# Altium PCB SectionD_v1.0.PcbDoc
Units mil, origin at the board's own origin, x right, y up, seen from the top; angles counter-clockwise.
Board outline 6000 x 4000 mil, 2 copper layers (Top Layer, Bottom Layer), stack 61.756 mil thick; 80 components, 93 nets, 361 pads, 0 vias.
Unrouted connection lines stored in the file: 236.
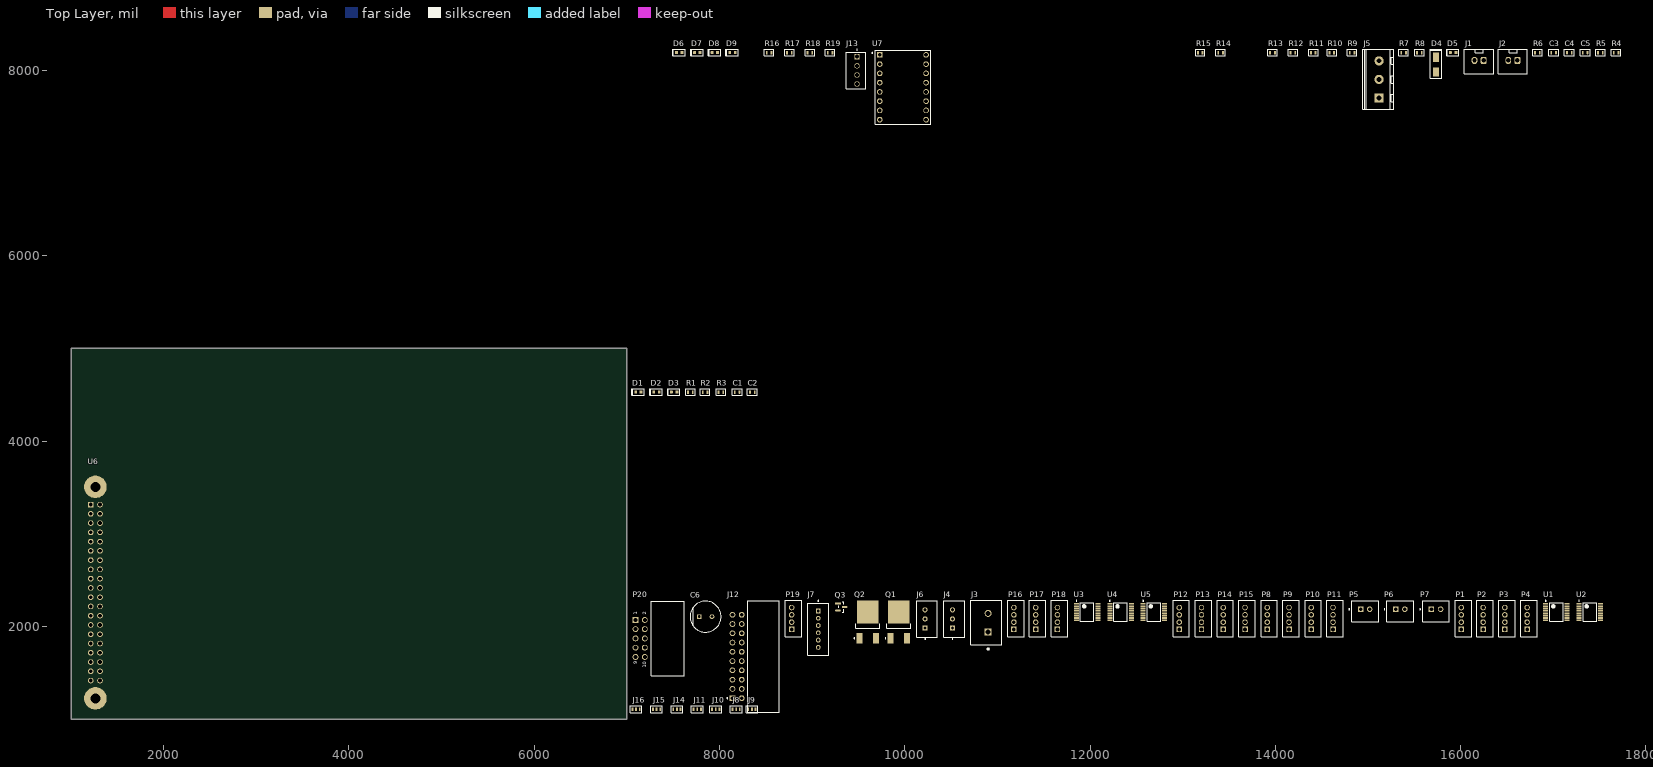
[diagram p0: Top Layer view]
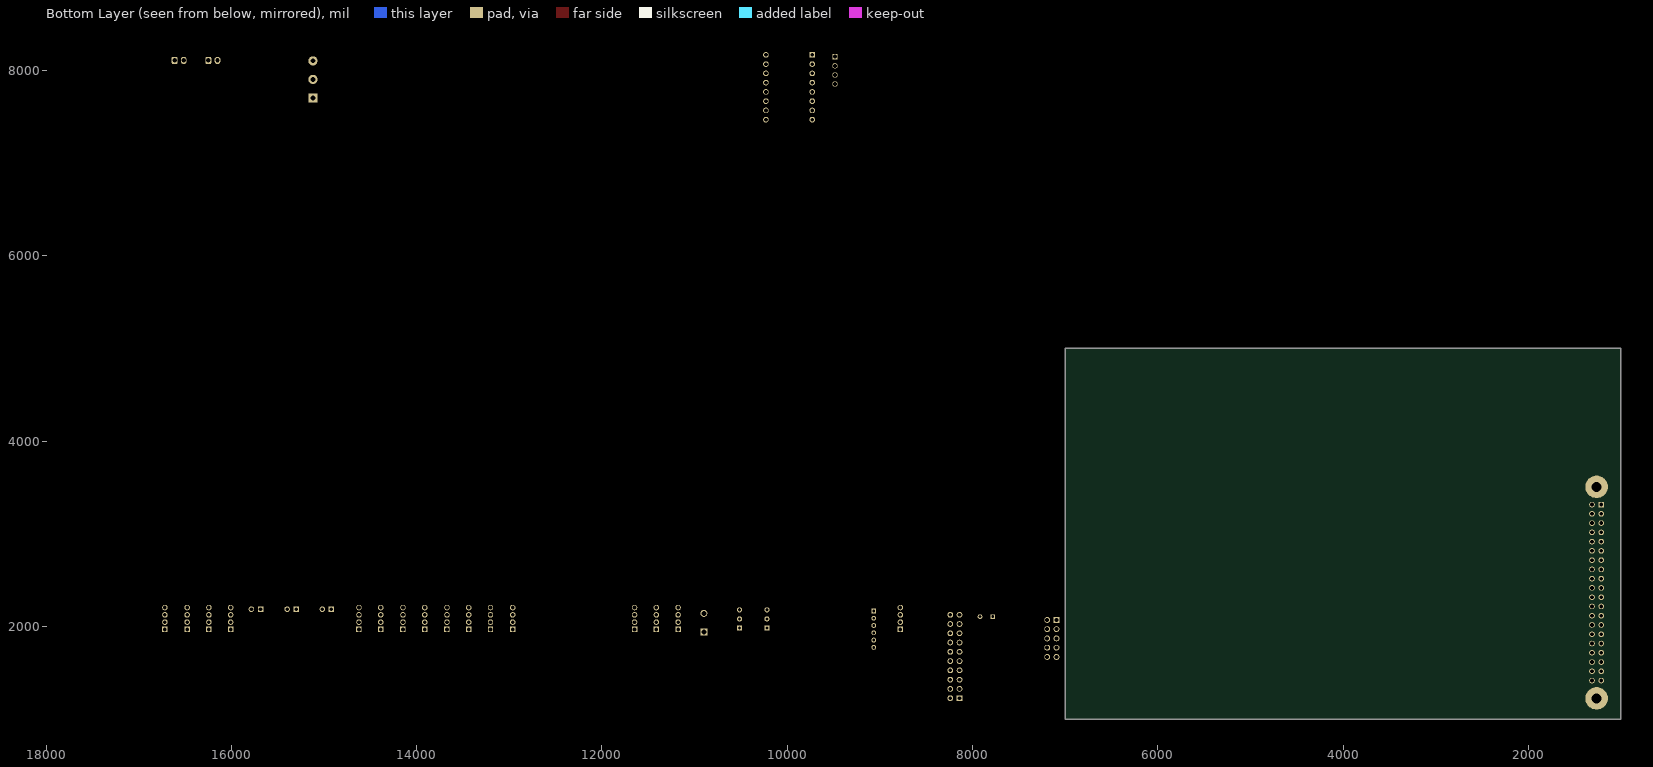
[diagram p1: Bottom Layer view, seen from below]

## Layer stack, top to bottom
Top Solder: solder mask 1, SM-001, Dk 4
Top Layer: signal copper 1.378
Dielectric 1: core 59, Core-043, Dk 4.3
Bottom Layer: signal copper 1.378
Bottom Solder: solder mask 1, SM-001, Dk 4

## Board outline
1000,1000 7000,1000 7000,5000 1000,5000

## Design rules (kind name [scope] priority, off if disabled: settings)
Clearance [All] p1: gap=10 ignorepadtopadclearanceinfootprint=FALSE except(0: Arc-Hole Track-Hole SMDPad-Hole THPad-Hole Via-Hole Fill-Hole Poly-Hole Region-Hole Text-Hole)
PolygonConnect [All] p1: connectstyle=Relief reliefconductorwidth=10 reliefentries=4 polygonreliefangle="90 Angle" airgapwidth=10
RoutingVias [All] p1: holewidth=28 width=50 viastyle="Through Hole" minholewidth=28 minwidth=50 maxholewidth=28 maxwidth=50
SolderMaskExpansion [All] p1: expansion=4 istentingtop=FALSE
Width [All] p1: maxlimit=10 minlimit=10 preferedwidth=10
30 further rules are at their usual default settings.

## Components (designator, comment, footprint, x,y, rotation, side; value= is the part's Value field where it differs from the comment)
C1 "0.1uF" "0.1uF 0603" 8190,4530 r0 top
C2 "0.1uF" "0.1uF 0603" 8355,4530 r0 top
C3 "0.1uF" "0.1uF 0603" 17005,8195 r0 top
C4 "0.1uF" "0.1uF 0603" 17175,8195 r0 top
C5 "0.1uF" "0.1uF 0603" 17345,8195 r0 top
C6 "EEU-FC1V221L" FP-EEU-FC1V221L-MFG 7850,2105 r0 top value=220uF
D1 "LED - Orange" LED0603-Orange 7125,4530 r0 top
D2 "LED - Orange" LED0603-Orange 7320,4530 r0 top
D3 "LED - Orange" LED0603-Orange 7510,4530 r0 top
D4 "1N4007" "M7 1N4007 SMA" 15735,8065 r90 top
D5 "LED - Orange" LED0603-Orange 15920,8195 r0 top
D6 "LED - Orange" LED0603-Orange 7565,8195 r0 top
D7 "LED - Orange" LED0603-Orange 7760,8195 r0 top
D8 "LED - Orange" LED0603-Orange 7950,8195 r0 top
D9 "LED - Orange" LED0603-Orange 8140,8195 r0 top
J1 "JST-XH 2P" "JST-XH 2P" 16200,8110 r0 top
J2 "JST-XH 2P" "JST-XH 2P" 16565,8110 r0 top
J3 "1755736" PHOE-1755736-2_V 10900,2040 r90 top
J4 "B3B-XH-A(LF)(SN)" FP-B3B-XH-A_LF_SN-MFG 10535,2080 r90 top
J5 "Screw Terminal" "Screw Terminal 3P 5.08MM" 15120,7905 r90 top
J6 "B3B-XH-A(LF)(SN)" FP-B3B-XH-A_LF_SN-MFG 10240,2080 r90 top
J7 "1735446-6" FP-1735446-6-MFG 9065,1970 r90 top
J8 "Solder Jumper" "SOLDER JUMPER" 8180,1105 r0 top
J9 "Solder Jumper" "SOLDER JUMPER" 8350,1105 r0 top
J10 "Solder Jumper" "SOLDER JUMPER" 7960,1105 r0 top
J11 "Solder Jumper" "SOLDER JUMPER" 7760,1105 r0 top
J12 "SFH11-PBPC-D10-RA-BK" FP-SFH11-PBPC-D10-RA-BK-MFG 8470,1675 r90 top
J13 "172732-4" TE_172732-4 9485,8150 r90 top
J14 "Solder Jumper" "SOLDER JUMPER" 7540,1105 r0 top
J15 "Solder Jumper" "SOLDER JUMPER" 7320,1105 r0 top
J16 "Solder Jumper" "SOLDER JUMPER" 7100,1105 r0 top
P1 "B4B-PH-K-S(LF)(SN)" JST-B4B-PH-K-S_V 16030,2085 r90 top
P2 "B4B-PH-K-S(LF)(SN)" JST-B4B-PH-K-S_V 16265,2085 r90 top
P3 "B4B-PH-K-S(LF)(SN)" JST-B4B-PH-K-S_V 16500,2085 r90 top
P4 "B4B-PH-K-S(LF)(SN)" JST-B4B-PH-K-S_V 16740,2085 r90 top
P5 "B2B-XH-A(LF)(SN)" JST-B2B-XH-A_V 14970,2185 r0 top
P6 "B2B-XH-A(LF)(SN)" JST-B2B-XH-A_V 15350,2185 r0 top
P7 "B2B-XH-A(LF)(SN)" JST-B2B-XH-A_V 15735,2185 r0 top
P8 "B4B-PH-K-S(LF)(SN)" JST-B4B-PH-K-S_V 13935,2085 r90 top
P9 "B4B-PH-K-S(LF)(SN)" JST-B4B-PH-K-S_V 14170,2085 r90 top
P10 "B4B-PH-K-S(LF)(SN)" JST-B4B-PH-K-S_V 14410,2085 r90 top
P11 "B4B-PH-K-S(LF)(SN)" JST-B4B-PH-K-S_V 14645,2085 r90 top
P12 "B4B-PH-K-S(LF)(SN)" JST-B4B-PH-K-S_V 12985,2085 r90 top
P13 "B4B-PH-K-S(LF)(SN)" JST-B4B-PH-K-S_V 13225,2085 r90 top
P14 "B4B-PH-K-S(LF)(SN)" JST-B4B-PH-K-S_V 13460,2085 r90 top
P15 "B4B-PH-K-S(LF)(SN)" JST-B4B-PH-K-S_V 13695,2085 r90 top
P16 "B4B-PH-K-S(LF)(SN)" JST-B4B-PH-K-S_V 11200,2085 r90 top
P17 "B4B-PH-K-S(LF)(SN)" JST-B4B-PH-K-S_V 11435,2085 r90 top
P18 "B4B-PH-K-S(LF)(SN)" JST-B4B-PH-K-S_V 11670,2085 r90 top
P19 "B4B-PH-K-S(LF)(SN)" JST-B4B-PH-K-S_V 8800,2085 r90 top
P20 "61201021721" 61201021721 7440,1870 r90 top
Q1 "NTD4805NT4G" ONSC-DPAK-3-369AA-01_V 9935,2045 r90 top
Q2 "NTD4805NT4G" ONSC-DPAK-3-369AA-01_V 9600,2045 r90 top
Q3 "BSS138" FP-318-08-IPC_B 9315,2210 r0 top
R1 "68R" "68R 0603" 7685,4530 r0 top
R2 "68R" "68R 0603" 7845,4530 r0 top
R3 "68R" "68R 0603" 8015,4530 r0 top
R4 "1k" "R0603 1k" 17680,8195 r0 top
R5 "1k" "R0603 1k" 17510,8195 r0 top
R6 "68R" "68R 0603" 16830,8195 r0 top
R7 "10k" "10k R0603" 15385,8195 r0 top
R8 "10k" "10k R0603" 15555,8195 r0 top
R9 "1k" "R0603 1k" 14830,8195 r0 top
R10 "1k" "R0603 1k" 14610,8195 r0 top
R11 "1k" "R0603 1k" 14410,8195 r0 top
R12 "4k7" "R0603 1k" 14190,8195 r0 top
R13 "1k" "R0603 1k" 13970,8195 r0 top
R14 "1k" "R0603 1k" 13410,8195 r0 top
R15 "1k" "R0603 1k" 13190,8195 r0 top
R16 "68R" "68R 0603" 8535,8195 r0 top
R17 "68R" "68R 0603" 8755,8195 r0 top
R18 "68R" "68R 0603" 8975,8195 r0 top
R19 "68R" "68R 0603" 9195,8195 r0 top
U1 "SN74HC595PWR" PW0016A_N 17035,2155 r0 top
U2 "SN74HC595PWR" PW0016A_N 17395,2155 r0 top
U3 "SN74HC165PWR" PW0016A_N 11970,2155 r0 top
U4 "SN74HC165PWR" PW0016A_N 12330,2155 r0 top
U5 "SN74HC165PWR" PW0016A_N 12690,2155 r0 top
U6 "RASPBERRY_PI_3_MODEL_B+" MODULE_RASPBERRY_PI_3_MODEL_B+ 1212,3315 r270 top
U7 "STEPPER_MOTOR_DRIVER_CARRIER" MODULE_A4988_STEPPER_MOTOR_DRIVER_CARRIER 9980,7820 r0 top

## Footprints (in the part's own frame and the unit in brackets; to place one, negate y for a bottom-side part, rotate by r counter-clockwise, add the part's x,y. Pads: shape width x height; smd on the part's side, far side on the other; paste and mask are expansions set on the pad)
"0.1uF 0603" [mm]
  rrect50% 0.5x0.95 smd: 1(-0.65,0) 2(0.65,0)
  silkscreen extent -1.4,-0.9 1.4,0.9, body extent -0.8,-0.4 0.8,0.4, height 0.8
"10k R0603" [mm]
  rect 0.5x0.95 smd: 1(-0.65,0) 2(0.65,0)
  silkscreen extent -1.3,-0.9 1.3,0.9, body extent -0.8,-0.4 0.8,0.4, height 0.45
"68R 0603" [mm]
  rect 0.5x0.95 smd: 1(-0.65,0) 2(0.65,0)
  silkscreen extent -1.3,-0.9 1.3,0.9, body extent -0.8,-0.4 0.8,0.4, height 0.45
61201021721 [mm] "10 pins, right angled, gold plating"
  rect 1.6x1.6 hole 1.1: 1(5.08,8.805)
  round 1.6 hole 1.1: 2(5.08,6.265) 3(2.54,8.805) 4(2.54,6.265) 5(0,8.805) 6(0,6.265) 7(-2.54,8.805) 8(-2.54,6.265) 9(-5.08,8.805) 10(-5.08,6.265)
  silkscreen extent -10.26,-4.5 10.26,4.5, body extent -10.18,-4.42 10.18,9.13, height 9.23
FP-318-08-IPC_B [mm]
  rect 1.524x0.578 smd paste+0 mask+0: 1(-0.91,0.95)
  rrect100% 1.524x0.578 smd paste+0 mask+0: 2(-0.91,-0.95) 3(0.91,0)
  silkscreen extent -0.65,-1.45 0.65,1.45, body extent -1.92,-1.7 1.92,1.7, height 0.25
FP-1735446-6-MFG [mm]
  rect 1.3x1.3 hole 0.8 paste-1000 mask+0: 1(5,-0.03)
  round 1.3 hole 0.8 paste-1000 mask+0: 2(3,-0.03) 3(1,-0.03) 4(-1,-0.03) 5(-3,-0.03) 6(-5,-0.03)
  silkscreen extent -7.15,-2.9 7.87,2.9, body extent -7.25,-3 7.25,3, height 0.25
FP-B3B-XH-A_LF_SN-MFG [mm]
  rect 1.4x1.4 hole 0.9 paste-1000 mask+0: 1(-2.5,0.525)
  round 1.4 hole 0.9 paste-1000 mask+0: 2(0,0.525) 3(2.5,0.525)
  silkscreen extent -5.61,-2.88 4.95,2.88, body extent -5.05,-2.98 5.05,2.98, height 0.25
FP-EEU-FC1V221L-MFG [mm]
  rect 1.3x1.3 hole 0.8 paste-1000 mask+0: 1(-1.75,0)
  round 1.3 hole 0.8 paste-1000 mask+0: 2(1.75,0)
  silkscreen extent -4.25,-4.25 4.25,4.25, body extent -4.35,-4.35 4.35,4.35, height 0.25
FP-SFH11-PBPC-D10-RA-BK-MFG [mm]
  rect 1.57x1.57 hole 1.02 paste-1000 mask+0: 1(-11.43,8.39)
  round 1.57 hole 1.02 paste-1000 mask+0: 2(-11.43,5.85) 3(-8.89,8.39) 4(-8.89,5.85) 5(-6.35,8.39) 6(-6.35,5.85) 7(-3.81,8.39) 8(-3.81,5.85) 9(-1.27,8.39) 10(-1.27,5.85) 11(1.27,8.39) 12(1.27,5.85) 13(3.81,8.39) 14(3.81,5.85) 15(6.35,8.39) 16(6.35,5.85) 17(8.89,8.39) 18(8.89,5.85) 19(11.43,8.39) 20(11.43,5.85)
  silkscreen extent -15.24,-4.45 15.24,9.92, body extent -15.34,-4.55 15.34,9.28, height 0.25
JST-B2B-XH-A_V [mm] "Header, 2-Leads, Body 7.4x5.75mm, Pitch 2.5mm"
  rect 1.5x1.5 hole 1: 1(-1.25,0)
  round 1.5 hole 1: 2(1.25,0)
  silkscreen extent -4.47,-3.4 3.7,2.35, body extent -3.7,-3.4 3.7,2.35, height 7
JST-B4B-PH-K-S_V [mm] "Connector, 4-Leads, Body 9.9x4.5mm, Pitch 2mm"
  rect 1.5x1.5 hole 1: 1(-3,0.55)
  round 1.5 hole 1: 2(-1,0.55) 3(1,0.55) 4(3,0.55)
  silkscreen extent -4.95,-2.25 4.95,2.25, body extent -4.95,-2.25 4.95,2.25, height 6
"JST-XH 2P" [mm]
  rrect50% 1.6x2 hole 1.2: 1(1.25,0)
  oval 1.6x2 hole 1.2: 2(-1.25,0)
  silkscreen extent -4,-3.6 4,3.1, body extent -3.7,-3.3 3.7,2.8, height 7.01
LED0603-Orange [mm]
  rrect50% 0.8x0.8 smd: 1(-0.75,0)
  rect 0.8x0.8 smd: 2(0.75,0)
  silkscreen extent -1.8,-0.9 1.6,1, body extent -0.8,-0.4 0.8,0.4, height 0.7
"M7 1N4007 SMA" [mm]
  rect 2.5x1.7 smd: 1(-2,0) 2(2,0)
  silkscreen extent -3.8,-1.6 4.2,1.52, body extent -2.6,-1.3 2.6,1.3, height 2.42
MODULE_A4988_STEPPER_MOTOR_DRIVER_CARRIER [mm]
  rect 1.53x1.53 hole 1.02: 1(-6.35,8.89)
  round 1.53 hole 1.02: 2(-6.35,6.35) 3(-6.35,3.81) 4(-6.35,1.27) 5(-6.35,-1.27) 6(-6.35,-3.81) 7(-6.35,-6.35) 8(-6.35,-8.89) 9(6.35,-8.89) 10(6.35,-6.35) 11(6.35,-3.81) 12(6.35,-1.27) 13(6.35,1.27) 14(6.35,3.81) 15(6.35,6.35) 16(6.35,8.89)
  silkscreen extent -8.5,-10.16 7.62,10.16
MODULE_RASPBERRY_PI_3_MODEL_B+ [mil]
  rect 60x60 hole 40: 1(0,0)
  round 60 hole 40: 2(0,100) 3(100,0) 4(100,100) 5(200,0) 6(200,100) 7(300,0) 8(300,100) 9(400,0) 10(400,100) 11(500,0) 12(500,100) 13(600,0) 14(600,100) 15(700,0) 16(700,100) 17(800,0) 18(800,100) 19(900,0) 20(900,100) 21(1000,0) 22(1000,100) 23(1100,0) 24(1100,100) 25(1200,0) 26(1200,100) 27(1300,0) 28(1300,100) 29(1400,0) 30(1400,100) 31(1500,0) 32(1500,100) 33(1600,0) 34(1600,100) 35(1700,0) 36(1700,100) 37(1800,0) 38(1800,100) 39(1900,0) 40(1900,100)
  round 244.09 hole 108.27 unplated: S1(-191.73,50) S2(2091.73,50)
ONSC-DPAK-3-369AA-01_V [mm] "DPAK, 3-Leads, Body 6.54x6.095mm, Pitch 2.29mm"
  rect 3x1.6 smd: 1(-4.4,2.29) 3(-4.4,-2.29)
  rect 6.2x5.8 smd: 4(2.8,0)
  silkscreen extent -4.52,-3.27 -0.45,3.76, body extent -1.6,-3.27 4.49,3.27, height 2.47
PHOE-1755736-2_V [mm] "THD, 2-Leads, Body 12.16x8.6mm, Pitch 5.08mm"
  rect 1.9x1.9 hole 1.4: 1(-2.54,0)
  round 1.9 hole 1.4: 2(2.54,0)
  silkscreen extent -7.42,-3.8 6.08,4.8, body extent -6.08,-3.8 6.08,4.8, height 12
PW0016A_N [mm] "SOP, 16-Leads, Body 5.1x4.5mm, Pitch 0.65mm, IPC Medium Density"
  rrect22% 1.4x0.45 smd: 1(-2.95,2.275) 2(-2.95,1.625) 3(-2.95,0.975) 4(-2.95,0.325) 5(-2.95,-0.325) 6(-2.95,-0.975) 7(-2.95,-1.625) 8(-2.95,-2.275) 9(2.95,-2.275) 10(2.95,-1.625) 11(2.95,-0.975) 12(2.95,-0.325) 13(2.95,0.325) 14(2.95,0.975) 15(2.95,1.625) 16(2.95,2.275)
  silkscreen extent -3.07,-2.55 1.85,3.17, body extent -3.21,-2.5 3.21,2.5, height 1
"R0603 1k" [mm]
  rect 0.5x0.95 smd: 1(-0.65,0) 2(0.65,0)
  silkscreen extent -1.3,-0.9 1.3,0.89, body extent -0.8,-0.4 0.8,0.4, height 0.45
"Screw Terminal 3P 5.08MM" [mm]
  rect 2.5x2.5 hole 1.3: 1(-5.08,0)
  round 2.5 hole 1.3: 2(0,0) 3(5.08,0)
  silkscreen extent -8.18,-4 8.22,4.4, body extent -8.12,-3.8 8.12,4.2, height 10.01
"SOLDER JUMPER" [mm]
  rect 0.5x1 smd: 1(-1,0) 2(0,0) 3(1,0)
  silkscreen extent -1.6,-0.9 1.6,0.9
TE_172732-4 [mm]
  rect 1.45x1.45 hole 1.1: 1(0,0)
  round 1.45 hole 1.1: 2(-2.5,0) 3(-5,0) 4(-7.5,0)
  silkscreen extent -8.75,-2.4 2,2.9

## Part data
C1 C2 C3 C4 C5: library part C0603C104M4RACTU, "CAP CER 0.1UF 16V X7R 0603", Capacitance=100nF, Case Code (Imperial)=0603, Case Code (Metric)=1608, Dielectric=X7R, Dielectric Material=Ceramic, Manufacturer=KEMET, Max Operating Temperature=125°C, Min Operating Temperature=-55°C, Package Quantity=1, Supplier Part Number 1=399-1099-1-ND, Tolerance=20%, Voltage Rating=16V, Case/Package=0603, Category="Ceramic Capacitors", ComponentLink1Description=https://datasheet.ciiva.com/18102/getdatasheetpartid-66190-18102310.pdf?src-supplier=Verical, ComponentLink1URL=https://datasheet.ciiva.com/18102/getdatasheetpartid-66190-18102310.pdf?src-supplier=Verical, ComponentLink2Description=https://datasheet.ciiva.com/7823/kem-c1002-x7r-smd-7823992.pdf?src-supplier=Element14, ComponentLink2URL=https://datasheet.ciiva.com/7823/kem-c1002-x7r-smd-7823992.pdf?src-supplier=Element14, ComponentLink3Description=https://datasheet.ciiva.com/7823/kem-c1002-x7r-smd-7823993.pdf?src-supplier=Element14, ComponentLink3URL=https://datasheet.ciiva.com/7823/kem-c1002-x7r-smd-7823993.pdf?src-supplier=Element14, ComponentLink4Description=https://datasheet.ciiva.com/14589/70095383-14589450.pdf?src-supplier=Allied+Electronics, ComponentLink4URL=https://datasheet.ciiva.com/14589/70095383-14589450.pdf?src-supplier=Allied+Electronics, ComponentLink5Description=https://datasheet.ciiva.com/18192/getdatasheetpartid-302288-18192716.pdf?src-supplier=Verical, ComponentLink5URL=https://datasheet.ciiva.com/18192/getdatasheetpartid-302288-18192716.pdf?src-supplier=Verical, Depth=0.8mm, Height=0.8mm, Lead Pitch=0.7mm, Length=1.6mm, Manufacturer Part Number=C0603C104M4RACTU, Mount="Surface Mount,PCB", Number of Pins=2, Packaging="Tape and Reel", Pricing 1="1=0.10000, 10=0.03100, 50=0.01720, 100=0.01400, 500=0.01002, 1000=0.00787 (USD)", Radiation Hardening=No, REACH SVHC="No SVHC", RoHS=Yes, Stock 1=114153, Supplier 1=Digi-Key, Termination=SMD/SMT, Thickness=0.034inch, Voltage Rating (DC)=16V, Width=0.031inch
C6: library part CMP-05427-000010-1, "CAP ALUM 220UF 20% 35V RADIAL", Capacitance=220uF, Leakage Current=77uA, Manufacturer="Panasonic Electronic Components", Package=0, Ripple Current=730mA, Temperature="-55°C to +105°C", Temperature Range High=+105°C, Temperature Range Low=-55°C, Tolerance=20%, Voltage Rating=35V, Automotive=Yes, Automotive Grade="Grade 2", Category=Cap, ComponentLink2Description=Datasheet, ComponentLink2URL=https://industrial.panasonic.com/cdbs/www-data/pdf/RDF0000/ABA0000C1209.pdf, Device Class L1="Passive Components", Device Class L2=Capacitors, Device Class L3="Aluminum Electrolytic Capacitors", Digikey Description="CAP ALUM 220UF 20% 35V RADIAL", Dissipation Factor=12%, Esr=0.085Ω, Height=16.5mm, Lead Free=Yes, Life=2000Hours, Manufacturer Part Number=EEU-FC1V221L, Material=Aluminum, Mouser Description="Capacitor; Aluminum Electrolytic; Fc Radial Elec Cap 220uF 35V", Octopart=https://octopart.com/eeu-fc1v221l-panasonic-39478519, RoHS=TRUE
D1 D2 D3 D5 D6 D7 D8 D9: library part LTST-C191KFKT, "LED ORANGE CLEAR SMD", Case Code (Imperial)=0603, Case Code (Metric)=1608, Color=Orange, Forward Current=30mA, Forward Voltage=2V, Lens Color=Colorless, Manufacturer="Vishay Lite-On", Max Operating Temperature=85°C, Min Operating Temperature=-55°C, Package Quantity=1, Power Dissipation=75mW, Reverse Voltage=5V, Supplier Part Number 1=160-1445-1-ND, Test Current=20mA, Case/Package=0603, Category=LEDs, ComponentLink1Description=https://datasheet.ciiva.com/2109/ltst-c191kfkt-2109968.pdf?src-supplier=Digi-Key, ComponentLink1URL=https://datasheet.ciiva.com/2109/ltst-c191kfkt-2109968.pdf?src-supplier=Digi-Key, ComponentLink2Description=https://datasheet.ciiva.com/12400/100-ltst-c191kfkt-39904-12400811.pdf?src-supplier=Mouser, ComponentLink2URL=https://datasheet.ciiva.com/12400/100-ltst-c191kfkt-39904-12400811.pdf?src-supplier=Mouser, ComponentLink3Description=https://datasheet.ciiva.com/11775/0900766b80dc02b0-11775613.pdf?src-supplier=RSComponents, ComponentLink3URL=https://datasheet.ciiva.com/11775/0900766b80dc02b0-11775613.pdf?src-supplier=RSComponents, ComponentLink4Description=https://datasheet.ciiva.com/15201/getdatasheetpartid-631075-15201391.pdf?src-supplier=Verical, ComponentLink4URL=https://datasheet.ciiva.com/15201/getdatasheetpartid-631075-15201391.pdf?src-supplier=Verical, ComponentLink5Description=https://datasheet.ciiva.com/2109/s-110-ltst-c191kfkt-2109969.pdf?src-supplier=Digi-Key, ComponentLink5URL=https://datasheet.ciiva.com/2109/s-110-ltst-c191kfkt-2109969.pdf?src-supplier=Digi-Key, Depth=0.8mm, Dominant Wavelength=605nm, Height=0.55mm, Illumination Color=Orange, Lead Free="Lead Free", Length=1.6mm, Lens Style=Diffused,Colorless,Rectangular, Lens Transparency=Clear, Luminous Intensity=90mcd, Manufacturer Part Number=LTST-C191KFKT, Mount="Surface Mount", Number of Elements=1, Number of LEDs=1, Number of Pins=2, Packaging="Tape and Reel", Power Rating=75mW, Pricing 1="1=0.24000, 10=0.17900, 100=0.08460, 500=0.05640, 1000=0.04418, 2500=0.04324 (USD)", Radiation Hardening=No, RoHS=Yes, Stock 1=92562, Supplier 1=Digi-Key, Viewing Angle=130°, Wavelength=611nm, Width=0.8mm
D4: library part 1N4007FLTR, "1000V 1A Rectifier", Manufacturer="Sangdest Microelectronics", Supplier Part Number 1=1655-1N4007FLCT-ND, Manufacturer Part Number=1N4007FLTR, Pricing 1="1=0.10000, 10=0.06600, 100=0.03120, 500=0.01848, 1000=0.01241 (USD)", RoHS=No, Stock 1=2517, Supplier 1=Digi-Key
J1 J2: library part B2B-XH-A(LF)(SN), "JST-XH 2 POS 2.5mm Solder ST Thru-Hole Box", Color=Natural, Contact Resistance=20mR, Current Rating=3A, Housing Color=White, Insulation Resistance=1GR, Manufacturer=JST, Max Operating Temperature=85°C, Max Voltage Rating (AC)=250V, Min Operating Temperature=-25°C, Supplier Part Number 1=1516276, Category="FFC / FPC", ComponentLink1Description=https://datasheet.ciiva.com/26894/getdatasheetpartid-640357-26894434.pdf?src-supplier=Verical, ComponentLink1URL=https://datasheet.ciiva.com/26894/getdatasheetpartid-640357-26894434.pdf?src-supplier=Verical, ComponentLink2Description=https://datasheet.ciiva.com/11746/0900766b8082653e-11746979.pdf?src-supplier=RSComponents, ComponentLink2URL=https://datasheet.ciiva.com/11746/0900766b8082653e-11746979.pdf?src-supplier=RSComponents, ComponentLink3Description=https://datasheet.ciiva.com/26894/getdatasheetpartid-385291-26894760.pdf?src-supplier=Verical, ComponentLink3URL=https://datasheet.ciiva.com/26894/getdatasheetpartid-385291-26894760.pdf?src-supplier=Verical, ComponentLink4Description=https://datasheet.ciiva.com/8052/5448-8052024.pdf?src-supplier=Element14, ComponentLink4URL=https://datasheet.ciiva.com/8052/5448-8052024.pdf?src-supplier=Element14, ComponentLink5Description=https://datasheet.ciiva.com/20207/523653-20207167.pdf?src-supplier=Rapid+Electronics, ComponentLink5URL=https://datasheet.ciiva.com/20207/523653-20207167.pdf?src-supplier=Rapid+Electronics, Connector Type="Male Pin", Contact Material=Brass, Contact Plating=Tin,Copper,Lead, Depth=5.75mm, Fastening Type=Detent, Housing Material=Polyamide, Lead Free="Lead Free", Lead Pitch=2.5mm, Length=7.4mm, Manufacturer Part Number=B2B-XH-A(LF)(SN), Max Current Rating=3A, Max Voltage Rating (DC)=250V, Mount="Through Hole", Number of Contacts=2, Number of Positions=2, Number of Rows=1, Orientation=Straight, Packaging=Bulk, Pitch=2.5mm, REACH SVHC="No SVHC", RoHS=Yes, Stock 1=165899, Supplier 1=Element14, Termination=Solder, Voltage Rating=250V, Voltage Rating (AC)=250V, Wire/Cable Gauge=22AWG
J3: library part CMP-2000-05300-1, "Male Header, Pitch 5.08 mm, 1 x 2 Postion, Height 12 mm, Tail Length 3.9 mm, RoHS, Bulk", Colour=Green, Manufacturer="Phoenix Contact", Content=250pc(s), Datasheet URL=http://www.mouser.com/ds/2/324/ItemDetail_1755736-921028.pdf, Datasheet Version=Apr-16, Industrial packaging=Yes, Manufacturer part No.=1755736, Manufacturer URL=http://www.phoenixcontact.com/, Number of Contacts=2, Pitch=5.08mm, Type=MSTBVA2,5/2-G-5,08
J4 J6: library part CMP-17439-000014-1, "CONN HEADER VERT 3POS 2.5MM", Current Rating=3A, Manufacturer=JST, Package=0, Temperature="-25°C to +85°C", Temperature Range High=+85°C, Temperature Range Low=-25°C, Voltage Rating=250V, Automotive=No, Category=Conn, ComponentLink2Description=Datasheet, ComponentLink2URL=https://www.jst-mfg.com/product/pdf/eng/eXH.pdf, Conn Gender=Male, Conn Orientation=Vertical, Contact Material=Tin,Copper, Device Class L1=Connectors, Device Class L2="Headers and Wire Housings", Device Class L3=unset, Digikey Description="CONN HEADER VERT 3POS 2.5MM", Height=7mm, Lead Free=Yes, Manufacturer Part Number=B3B-XH-A(LF)(SN), Number of Contacts=3, Number of Rows=1, Octopart=https://octopart.com/b3b-xh-a%28lf%29%28sn%29-jst-3990185, Pitch=2.5mm, RoHS=TRUE
J5: library part OSTTC032162, "TERM BLK 3P SIDE ENT 5.08MM PCB", Color=Blue, Current=15A, Flammability Rating="UL94 V-0", Manufacturer="On-Shore Technology", Max Operating Temperature=105°C, Min Operating Temperature=-30°C, Supplier Part Number 1=ED2610-ND, Voltage=300V, Category="Terminal Blocks", ComponentLink1Description=https://datasheet.ciiva.com/823/osttcxx2162-823568.pdf?src-supplier=Digi-Key, ComponentLink1URL=https://datasheet.ciiva.com/823/osttcxx2162-823568.pdf?src-supplier=Digi-Key, ComponentLink2Description=https://datasheet.ciiva.com/19458/2120655-19458972.pdf?src-supplier=Jameco, ComponentLink2URL=https://datasheet.ciiva.com/19458/2120655-19458972.pdf?src-supplier=Jameco, Contact Material=Brass, Contact Plating=Tin, Height=10mm, Housing Color=Blue, Housing Material=Thermoplastic, Lead Free="Lead Free", Length=15.2mm, Manufacturer Part Number=OSTTC032162, Max Current Rating=15A, Mount="Through Hole", Number of Contacts=3, Number of Levels=1, Number of Positions=3, Number of Positions Per Level=3, Number of Rows=1, Packaging=Bulk, Pitch=0.2inch, Plating=Steel, Pricing 1="1=0.85000, 10=0.53000, 25=0.45400, 50=0.40800, 100=0.39950, 250=0.34000, 500=0.32300, 1000=0.28900, 5000=0.22610 (USD)", RoHS=Yes, Stock 1=3645, Supplier 1=Digi-Key, Termination=Screw, Width=7.6mm, Wire Gauge (Max)=22AWG, Wire Gauge (Min)=14AWG
J7: library part CMP-03369-000087-1, "CONN HEADER VERT 6POS 2MM", Current Rating=3A, Manufacturer=TE, Temperature="-25°C to +85°C", Temperature Range High=+85°C, Temperature Range Low=-25°C, Voltage Rating=100V, Automotive=No, Category=Conn, ComponentLink2Description=Datasheet, ComponentLink2URL=https://www.te.com/usa-en/product-1735446-6.html, Conn Gender=Male, Conn Orientation=Vertical, Contact Material=Tin,Nickel, Device Class L1=Connectors, Device Class L2="Headers and Wire Housings", Device Class L3=unset, Digikey Description="CONN HEADER VERT 6POS 2MM", Height=6.37mm, Lead Free=Yes, Manufacturer Part Number=1735446-6, Mouser Description="Headers & Wire Housings 6 POS HDR VERT 2.0mm", Number of Contacts=6, Number of Rows=1, Octopart=https://octopart.com/1735446-6-te+connectivity-42205942, Package=1735446-6, Pitch=2mm, RoHS=TRUE
J12: library part CMP-25680-000003-1, "CONN HDR 20POS 0.1 GOLD PCB R/A", Current Rating=3A, Manufacturer=Sullins, Temperature="-40°C to +105°C", Temperature Range High=+105°C, Temperature Range Low=-40°C, Automotive=No, Category=Conn, ComponentLink2Description=Datasheet, ComponentLink2URL=https://s3.amazonaws.com/catalogspreads-pdf/PAGE123%20.100%20SFH11%20SERIES%20FEMALE%20HDR%20ST%20RA.pdf, Conn Gender=Female, Conn Orientation="Right Angle", Contact Material=Gold,Nickel, Device Class L1=Connectors, Device Class L2="Headers and Wire Housings", Device Class L3=unset, Digikey Description="CONN HDR 20POS 0.1 GOLD PCB R/A", Footprint Url=https://drawings-pdf.s3.amazonaws.com/11161.pdf, Height=7.2mm, Is Female=yes, Lead Free=Yes, Manufacturer Part Number=SFH11-PBPC-D10-RA-BK, Number of Contacts=20, Number of Rows=2, Octopart=https://octopart.com/sfh11-pbpc-d10-ra-bk-sullins-12270496, Package=SFH11-PBPC-D10-RA-BK, Pitch=2.54mm, RoHS=TRUE
J13: "EIS POST HDR WITH KINK 10P", Package=None, Availability=Unavailable, MP=172732-4, Price=None
P1 P2 P3 P4 P8 P9 P10 P11 P12 P13 P14 P15 P16 P17 P18 P19: library part CMP-2000-05165-1, "Male Header, Pitch 2 mm, 1 x 4 Position, Height 6 mm, Tail Length 3.4 mm, -25 to 85 degC, RoHS, Bulk", Manufacturer=JST, Datasheet URL=http://datasheet.octopart.com/B4B-PH-K-S%28LF%29%28SN%29-JST-datasheet-10558886.pdf, Datasheet Version=Apr-09, Manufacturer URL=http://www.jst.com/home2.html, No of Positions=4, Pitch=2mm, Style/Orientation=StraightHeader/Plug, Termination=Crimp, Type=ShroudedHeader
P5 P6 P7: library part CMP-2000-05888-1, "Male Header, Pitch 2.5 mm, 1 x 2 Position, Height 7 mm, Tail Length 3.4 mm, -25 to 85 degC, RoHS, Bulk", Manufacturer=JST, Package Description="Male Header, Pitch 2.5 mm, 1 x 2 Position, Height 7 mm, Tail Length 3.4 mm", Package Reference=B2B-XH-A, Datasheet URL=http://www.jst-mfg.com/product/pdf/eng/eXH.pdf, Datasheet Version=05/2016, Manufacturer URL=http://www.jst.com/home2.html, Mounting Technology=ThroughHole, No of Positions=2, Pitch=2.5mm, Style/Orientation=StraightHeader/Plug, Termination=Crimp, Type=ShroudedHeader
P20: library part CMP-1502-00021-1, "Male Box Header WR-BHD, THT, Angled, pitch 2.54 mm, 10 pins", Contact Resistance=20mOhm, Manufacturer="Wurth Elektronik", Operating Temperature=-40to125degC, Withstanding Voltage=500VAC, Working Voltage=250VAC, Datasheet URL=https://katalog.we-online.de/em/datasheet/6120xx21721.pdf, Gender=Male, Manufacturer URL=http://www.we-online.de, Mounting Technology=THT, Orientation=Angled, Package Reference=61201021721, Packaging=Tray, Part Number=61201021721, Pin Number=10, Pitch=2.54mm, Published Date=August2018, Publisher=WurthElektronik
Q1 Q2: library part CMP-1058-00313-1, "Power MOSFET, 30 V, 88 A, Single N-Channel, 3-Pin DPAK, Pb-Free, Tape and Reel", Manufacturer="On Semiconductor", Package Type="DPAK-3, IPAK-4", Channel Polarity="N Channel", Ciss Typ (pF)=2865, ComponentLink1Description="Manufacturer URL", ComponentLink1URL=http://www.onsemi.com/, ComponentLink2Description=Datasheet, ComponentLink2URL=http://www.onsemi.cn/pub_link/Collateral/NTD4805N-D.PDF, ComponentLink3Description="Package Specification", ComponentLink3URL=http://www.onsemi.cn/pub_link/Collateral/369AA.PDF, Configuration=Single, Coss Typ (pF)=610, Crss Typ (pF)=338, DatasheetVersion="Rev. 7", ID Max (A)=88, Mounting Technology="Surface Mount", PackageDescription="3-Pin Flange Mount, Body 6.54 x 6.095 mm, Pitch 2.29 mm", PackageReference=DPAK-3-369AA-01, PackageVersion="Rev. B, 06/2010", Packing="Tape and Reel", PartNumber=NTD4805NT4G, Qrr Typ (nC)=18, RoHS=Pb-Free, V(BR)DSS Min (V)=30, VGS Max (V)=20, VGS(th) Max (V)=2.5
Q3: library part CMP-07173-000101-1, "MOSFET N-CH 50V 220MA SOT-23", Case/Package=SOT-23, Continuous Drain Current (ID)=220mA, Drain to Source Breakdown Voltage=50V, Drain to Source Resistance=3.5R, Gate to Source Voltage (Vgs)=20V, Input Capacitance=27pF, Max Operating Temperature=150°C, Max Power Dissipation=360mW, Min Operating Temperature=-55°C, On-State Resistance=6R, Package Quantity=1, Threshold Voltage=1.3V, Contact Plating=Tin, Current Rating=220mA, Drain to Source Voltage (Vdss)=50V, Dual Supply Voltage=50V, Element Configuration=Single, Fall Time=9ns, Height=0.93mm, Lead Free="Lead Free", Length=2.92mm, Mount="Surface Mount", Nominal Vgs=1.3V, Number of Elements=1, Number of Pins=3, Packaging="Tape and Reel", Power Dissipation=360mW, Radiation Hardening=No, Rds On Max=3.5R, REACH SVHC="No SVHC", Rise Time=9ns, Termination=SMD/SMT, Turn-Off Delay Time=20ns, Turn-On Delay Time=2.5ns, Voltage Rating (DC)=50V, Weight=0.03g, Width=1.3mm
R1 R2 R3 R6 R16 R17 R18 R19: library part CRGP0603F68R, "CRGP 0603 68R 1%", Case Code (Imperial)=0603, Case Code (Metric)=1608, Manufacturer="TE Connectivity", Max Operating Temperature=155°C, Max Power Dissipation=250mW, Min Operating Temperature=-55°C, Resistor Type="Thick Film", Supplier Part Number 1=A130402CT-ND, Temperature Coefficient=200ppm/°C, Tolerance=1%, Case/Package=0603, Category="Chip SMD Resistors", ComponentLink1Description=https://www.te.com/commerce/DocumentDelivery/DDEController?Action=srchrtrv&amp;DocNm=9-1773463-9&amp;DocType=DS&amp;DocLang=English&src-supplier=Digi-Key, ComponentLink1URL=https://www.te.com/commerce/DocumentDelivery/DDEController?Action=srchrtrv&amp;DocNm=9-1773463-9&amp;DocType=DS&amp;DocLang=English&src-supplier=Digi-Key, Manufacturer Part Number=CRGP0603F68R, Number of Terminations=2, Packaging="Tape and Reel", Pricing 1="1=0.14000, 10=0.11400, 100=0.04470, 1000=0.01870, 2500=0.01714 (USD)", Resistance=68R, RoHS=No, Stock 1=49308, Supplier 1=Digi-Key
R4 R5 R9 R10 R11 R12 R13 R14 R15: library part CRGCQ0603F1K0, "0603 1k Ohm 1% 1/10W", Case Code (Imperial)=0603, Case Code (Metric)=1608, Manufacturer="TE Connectivity", Max Operating Temperature=155°C, Max Power Dissipation=100mW, Min Operating Temperature=-55°C, Resistance=1kR, Resistor Type="Thick Film", Supplier Part Number 1=A129688CT-ND, Temperature Coefficient=100ppm/°C, Tolerance=1%, Case/Package=0603, Category="Chip SMD Resistors", ComponentLink1Description=https://www.te.com/commerce/DocumentDelivery/DDEController?Action=srchrtrv&DocNm=1773204-3&DocType=DS&DocLang=English&src-supplier=Digi-Key, ComponentLink1URL=https://www.te.com/commerce/DocumentDelivery/DDEController?Action=srchrtrv&DocNm=1773204-3&DocType=DS&DocLang=English&src-supplier=Digi-Key, ComponentLink2Description=https://4donline.ihs.com/images/VipMasterIC/IC/TYEL/TYEL-S-A0004929575/TYEL-S-A0004929575-1.pdf?hkey=52A5661711E402568146F3353EA87419&src-supplier=Farnell, ComponentLink2URL=https://4donline.ihs.com/images/VipMasterIC/IC/TYEL/TYEL-S-A0004929575/TYEL-S-A0004929575-1.pdf?hkey=52A5661711E402568146F3353EA87419&src-supplier=Farnell, ComponentLink3Description=https://www.te.com/commerce/DocumentDelivery/DDEController?Action=srchrtrv&amp;DocNm=1773204-3&amp;DocType=DS&amp;DocLang=English&src-supplier=Digi-Key, ComponentLink3URL=https://www.te.com/commerce/DocumentDelivery/DDEController?Action=srchrtrv&amp;DocNm=1773204-3&amp;DocType=DS&amp;DocLang=English&src-supplier=Digi-Key, ComponentLink4Description=https://4donline.ihs.com/images/VipMasterIC/IC/TYEL/TYEL-S-A0004929575/TYEL-S-A0004929575-1.pdf?hkey=52A5661711E402568146F3353EA87419&src-supplier=Element14, ComponentLink4URL=https://4donline.ihs.com/images/VipMasterIC/IC/TYEL/TYEL-S-A0004929575/TYEL-S-A0004929575-1.pdf?hkey=52A5661711E402568146F3353EA87419&src-supplier=Element14, ComponentLink5Description=https://4donline.ihs.com/images/VipMasterIC/IC/TYEL/TYEL-S-A0004929575/TYEL-S-A0004929575-1.pdf?hkey=52A5661711E402568146F3353EA87419&src-supplier=Newark, ComponentLink5URL=https://4donline.ihs.com/images/VipMasterIC/IC/TYEL/TYEL-S-A0004929575/TYEL-S-A0004929575-1.pdf?hkey=52A5661711E402568146F3353EA87419&src-supplier=Newark, Features="Moisture Resistant,Automotive AEC-Q200", Manufacturer Part Number=CRGCQ0603F1K0, Number of Terminations=2, Packaging="Cut Tape", Pricing 1="1=0.10000, 10=0.02700, 100=0.01090, 1000=0.00490, 2500=0.00426 (USD)", RoHS=No, Stock 1=37973, Supplier 1=Digi-Key
R7 R8: library part CRG0603F10K/10, "RES 10.0K OHM 1/10W 1% 0603", Case Code (Imperial)=0603, Manufacturer="TE Connectivity", Max Operating Temperature=125°C, Max Power Dissipation=100mW, Min Operating Temperature=-55°C, Number of Resistors=1, Package Quantity=10000, Resistance=10kR, Resistor Type="Thick Film", Supplier Part Number 1=A121523CT-ND, Temperature Coefficient=100ppm/°C, Tolerance=1%, Voltage Rating=50V, Case/Package=0603, Category="Chip SMD Resistors", ComponentLink1Description=https://datasheet.ciiva.com/2530/eng-cd-1622829-ba-2530062.pdf?src-supplier=Digi-Key, ComponentLink1URL=https://datasheet.ciiva.com/2530/eng-cd-1622829-ba-2530062.pdf?src-supplier=Digi-Key, Depth=0.8mm, ELV=Compliant, Height=0.022inch, Length=1.6mm, Manufacturer Part Number=CRG0603F10K/10, Military Standard=Not, Mount="Surface Mount", Number of Terminations=2, Packaging="Tape and Reel", Power Rating=100mW, Pricing 1="1=0.10000, 10=0.03100, 100=0.01270, 1000=0.00570, 2500=0.00494, 5000=0.00409 (USD)", Radiation Hardening=No, RoHS=Yes, Stock 1=172089, Supplier 1=Digi-Key, Termination=Solder, Weight=7.1E-05oz, Width=0.8mm
U1 U2: library part CMP-0780-00192-3, "8-Bit Shift Registers With 3-State Output Registers, PW0016A, LARGE T&R", F @ Nom Voltage(Max)(Mhz)=28, Generic Part Number=SN74HC595, ICC @ Nom Voltage(Max)(mA)=0.08, Manufacturer="Texas Instruments", Operating Temperature Range(C)="-40 to 85", Rating=Military, tpd @ Nom Voltage(Max)(ns)=34, Voltage(Nom)(V)=6, 3-State Output=Yes, Bits=8, Code_JEDEC=MO-153, DatasheetVersion=SCLS041H, Input Type=CMOS, Output Drive (IOL/IOH)(Max)(mA)=7.8/-7.8, Output Type=CMOS, PackageReference=PW0016A, PackageVersion=http://www.ti.com/lit/ml/mpds361/mpds361.pdf, Technology Family=HC, VCC(Max)(V)=6, VCC(Min)(V)=2
U3 U4 U5: library part CMP-0780-00188-3, "8-Bit Parallel-Load Shift Registers, PW0016A, LARGE T&R", F @ Nom Voltage(Max)(Mhz)=28, Generic Part Number=SN74HC165, ICC @ Nom Voltage(Max)(mA)=0.08, Manufacturer="Texas Instruments", Operating Temperature Range(C)="-40 to 125", Rating=Catalog, tpd @ Nom Voltage(Max)(ns)=38, Voltage(Nom)(V)=6, 3-State Output=No, Bits=4, Code_JEDEC=MO-153, DatasheetVersion=SCLS116G, Input Type=CMOS, Output Drive (IOL/IOH)(Max)(mA)=5.2/-5.2, Output Type=CMOS, PackageReference=PW0016A, PackageVersion=http://www.ti.com/lit/ml/mpds361/mpds361.pdf, Technology Family=HC, VCC(Max)(V)=6, VCC(Min)(V)=2
U6: "BCM2837B0 Raspberry Pi 3 Model B+ - ARMÂ® CortexÂ®-A53, VideoCore MPU Embedded Evaluation Board", Package="Raspberry Pi", Check_prices=https://www.snapeda.com/parts/RASPBERRY%20PI%203%20MODEL%20B+/Raspberry%20Pi/view-part/4299836/?ref=eda, Digi-Key_Part_Number=1690-1025-ND, MF="Raspberry Pi", MP="RASPBERRY PI 3 MODEL B+", SnapEDA_Link=https://www.snapeda.com/parts/RASPBERRY%20PI%203%20MODEL%20B+/Raspberry%20Pi/view-part/4299836/?ref=snap
U7: library part A4988_STEPPER_MOTOR_DRIVER_CARRIER, "Stepper Motor Driver", Package=None, Availability=Unavailable, MF=Pololu, MP="A4988 STEPPER MOTOR DRIVER CARRIER", Price=None, SnapEDA_Link=https://www.snapeda.com/parts/A4988%20STEPPER%20MOTOR%20DRIVER%20CARRIER/Pololu/view-part/1499394/?ref=snap

## Nets (pads, with @x,y where several pads share a name; then routed paths per layer and width w, separated by ;. In a path a pad name is that pad's centre, name@x,y a point inside that pad or via, vN(x,y) a via of type N, cw(c..) or ccw(c..) an arc to the next point about the centre after c; other vN are vias at no path point)
1A: D6.1 J13.1 U7.12
1B: D7.1 J13.2 U7.11
2A: D8.1 J13.3 U7.13
2B: D9.1 J13.4 U7.14
+3V3: C1.2 C2.2 C3.2 C4.2 C5.2 J4.2 J5.2 J9.1 J10.1 J11.1 J12.1 J14.1 J15.1 J16.1 P1.1 P2.1 P3.1 P4.1 P5.1 P8.3 P9.3 P10.3 P11.3 P12.3 P13.3 P14.3 P15.3 P16.1 P17.1 P18.1 P20.2 Q3.1 R3.2 R7.2 R12.1 R14.2 R15.2 U1.16 U2.16 U3.16 U4.16 U5.16 U7.10
+5V: D4.2 J1.1 J2.1 J3.1 J6.3 J8.3 P6.1 R2.2 R6.2 R8.2
+12V: C6.1 P7.1 R1.2 R16.2 R17.2 R18.2 R19.2 U7.16
BLUE: J12.16 U2.6
BUZZER: R9.1 U1.1
CLK_EN: U3.15 U4.15 U5.15 U6.18
CLOCK: U1.11 U2.11 U3.2 U4.2 U5.2 U6.36
"CONN M1": J7.1 U6.8
"CONN M2": J7.2 U6.10
"CONN SW1": J7.3 U4.3
"CONN SW2": J7.4 U4.14
CONTAINER: J12.3 U5.5
D_OUTPUT: U1.14 U6.40
DIRECTION: U6.35 U7.8
DISP_FAN: R10.1 U1.15
DROP: J12.7 U6.21
E_OUTPUT: U2.14 U6.38
ENABLE: J12.15 U6.23
EXTRA_1: J12.17 U5.13
EXTRA_2: J12.18 U5.12
FLOW: Q3.2 R7.1 U6.29
GND: C1.1 C2.1 C3.1 C4.1 C5.1 D2.1 D3.1 J4.3 J5.3 J6.2 J7.6 J9.3 J10.3 J11.3 J12.20 J14.3 J15.3 J16.3 P1.4 P2.4 P3.4 P5.2 P6.2 P8.4 P9.4 P10.4 P11.4 P12.4 P13.4 P14.4 P15.4 P16.4 P17.4 P18.4 P19.4 P20.1 Q1.3 Q2.3 R4.1 R5.1 R11.2 R13.2 U1.8 U2.8 U3.8 U4.8 U5.8 U6.6 U6.9 U6.14 U6.20 U6.25 U6.30 U6.34 U6.39 U7.9
GREEN: J12.5 U2.4
LATCH_IN: U3.1 U4.1 U5.1 U6.22
LATCH_OUT: U1.12 U2.12 U6.13
LED_0: P1.2 U1.7
LED_1: P2.2 U1.6
LED_2: P3.2 U1.5
LED_BLUE: P4.3 U1.3
LED_GREEN: P4.4 U1.2
LED_RED: P4.2 U1.4
LID: J12.2 U5.6
LIFT: J12.9 U6.19
LIMIT_0: P16.2 U4.6
LIMIT_1: P17.2 U4.5
LIMIT_2: P18.2 U4.4
MAIN_DIR: P20.3 U6.11
MAIN_PWM: P20.4 U6.12
MOT_FAN: P20.8 U2.7
NetD1_2: D1.2 R1.1
NetD2_2: D2.2 R2.1
NetD3_2: D3.2 R3.1
NetD4_1: D4.1 D5.1 J1.2 J2.2 Q2.4
NetD5_2: D5.2 R6.1
NetD6_2: D6.2 R16.1
NetD7_2: D7.2 R17.1
NetD8_2: D8.2 R18.1
NetD9_2: D9.2 R19.1
NetJ3_2: J3.2 Q1.4
NetJ6_1: J6.1 Q3.3 R8.1
NetJ8_1: J8.1 U6.2 U6.4
NetJ9_2: J9.2 U7.1
NetJ10_2: J10.2 U7.5
NetJ11_2: J11.2 U7.6
NetJ14_2: J14.2 U7.2
NetJ15_2: J15.2 U7.3
NetJ16_2: J16.2 U7.4
NetQ1_1: Q1.1 R9.2 R11.1
NetQ2_1: Q2.1 R10.2 R13.1
NetR4_2: R4.2 U5.10 U5.11
NetR5_2: R5.2 U4.11 U4.12 U4.13
PGND: C6.2 D1.1 P7.2 U7.15
PUMP_1: J12.6 U2.3
PUMP_2: J12.8 U2.2
PUMP_3: J12.10 U2.1
PUMP_4: J12.19 U2.15
RED: J12.4 U2.5
RPM_A: P20.5 U6.32
RPM_B: P20.6 U6.33
SCL: P19.1 R14.1 U6.5
SDA: P19.2 R15.1 U6.3
SERIAL_IN: U3.9 U6.16
SERIAL_IN1: U3.10 U4.9
SERIAL_IN2: U4.10 U5.9
SR_OE: U1.13 U2.13 U6.15
SR_RESET: U1.10 U2.10 U6.37
STEP: U6.31 U7.7
SW_1: J12.11 U5.4
SW_2: J12.13 U5.3
SW_3: J12.14 U5.14
TEMP: J4.1 J5.1 J12.12 P20.7 R12.2 U6.7
TOUCH_0: P8.1 U3.6
TOUCH_1: P9.1 U3.5
TOUCH_2: P10.1 U3.4
TOUCH_3: P11.1 U3.3
TOUCH_4: P12.1 U3.14
TOUCH_5: P13.1 U3.13
TOUCH_6: P14.1 U3.12
TOUCH_7: P15.1 U3.11
pads on no net: J7.5 J8.2 P1.3 P2.3 P3.3 P8.2 P9.2 P10.2 P11.2 P12.2 P13.2 P14.2 P15.2 P16.3 P17.3 P18.3 P19.3 P20.9 P20.10 U1.9 U2.9 U3.7 U4.7 U5.7 U6.1 U6.17 U6.24 U6.26 U6.27 U6.28 U6.S1 U6.S2

## Text inside footprints (layer, text, board x,y; h text height)
P20: Top Overlay "9" at 7111.65,1592.83 h40 r90; Top Overlay "10" at 7211.65,1555.04 h40 r90; Top Overlay "2" at 7211.65,2123.54 h40 r90; Top Overlay "1" at 7111.65,2127.48 h40 r90